# EAGLE board SoM2260 (EAGLE 8.7.1)
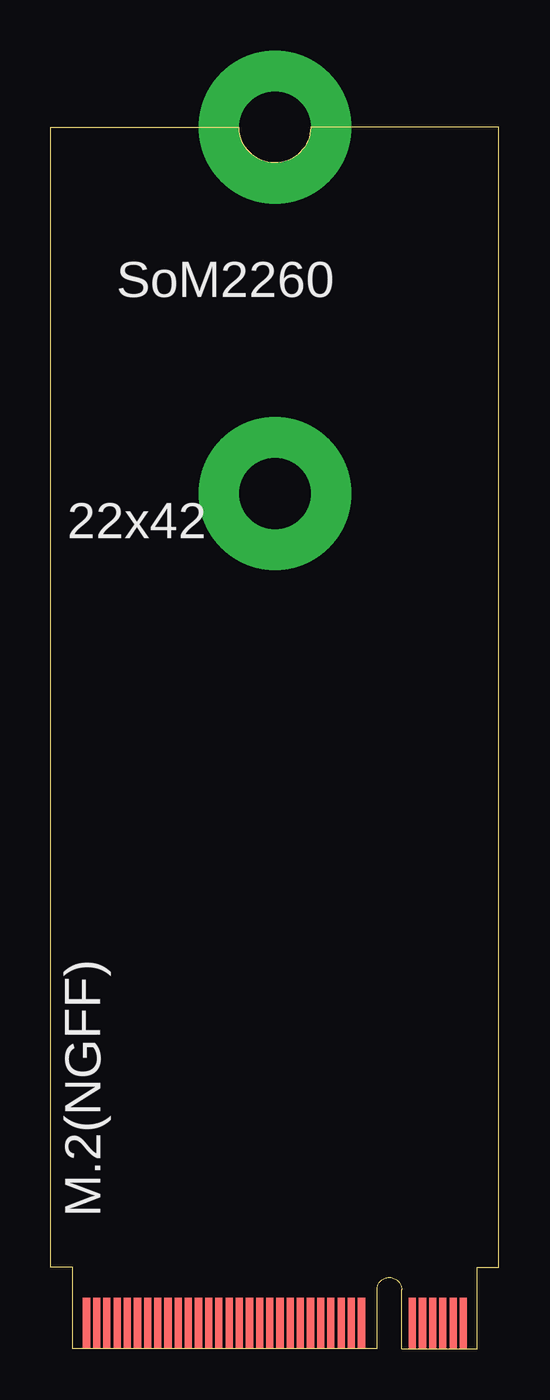
[diagram p0: board, top side]
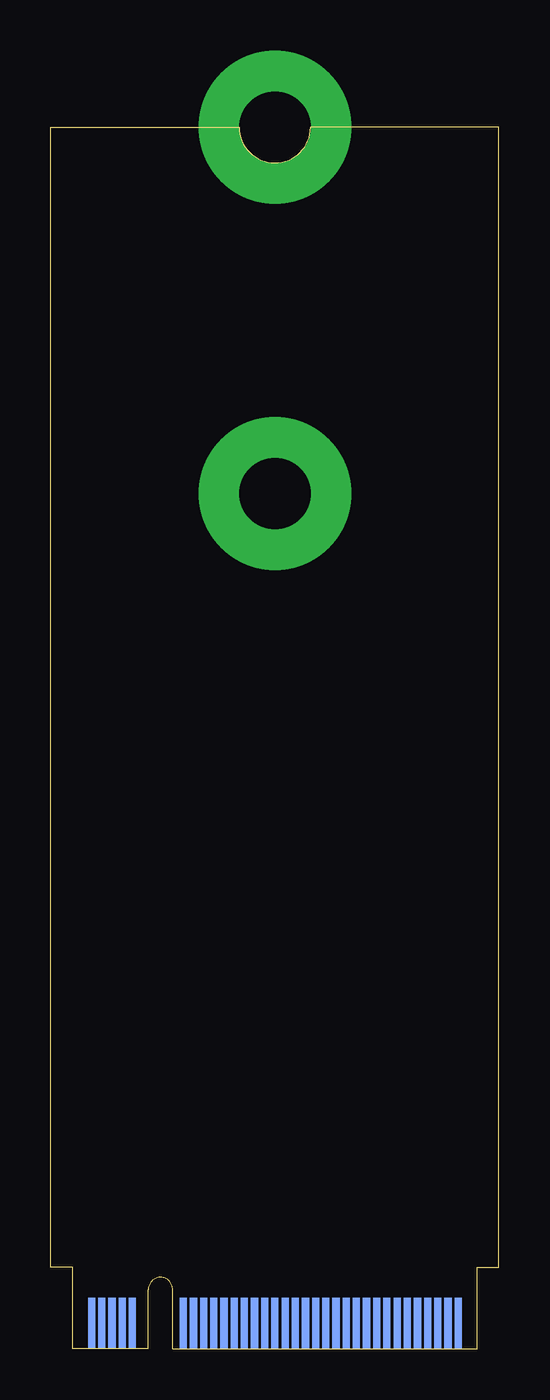
[diagram p1: board, bottom side, seen from below]

Size 22 x 60 mm. Coordinates in mm from the lower left corner, seen from the top.
Outline: 9.25,60 0,60 0,4 1.07,4 1.07,0 16.02,0 16.02,2.9 arc-90 16.6,3.5 arc-90 17.23,2.9 17.23,0 20.93,0 20.93,4 22,4 22,60 12.75,60
Outline: 12.75,60 arc-180 9.25,60
Outline: 12.75,60 arc-180 9.25,60
Copper layers (1*16): Top 0.035mm / dielectric 1.5mm / Bottom 0.035mm
Design rules "default": minimum track width 6mil, minimum drill 0.35mm, track to track 6mil, track to pad 6mil, pad to pad 6mil, via to via 6mil, smd to smd 6mil, copper to edge 40mil, drill to drill 6mil, minimum pad ring 10mil, minimum via ring 8mil, stop-mask expansion 4mil, vias tented up to drill 0mil, thermal gap 10mil

## Footprints (pad centres in the part's own frame; a part is rotated, then mirrored left to right if it is on the bottom)
M.2-MSLOT-TOP = smd 0.35 x 2.5: 1 0,0; 2 -0.5,0; 3 -1,0; 4 -1.5,0; 5 -2,0; 6 -2.5,0; 7 -5,0; 8 -5.5,0; 9 -6,0; 10 -6.5,0; 11 -7,0; 12 -7.5,0; 13 -8,0; 14 -8.5,0; 15 -9,0; 16 -9.5,0; 17 -10,0; 18 -10.5,0; 19 -11,0; 20 -11.5,0; 21 -12,0; 22 -12.5,0; 23 -13,0; 24 -13.5,0; 25 -14,0; 26 -14.5,0; 27 -15,0; 28 -15.5,0; 29 -16,0; 30 -16.5,0; 31 -17,0; 32 -17.5,0; 33 -18,0; 34 -18.5,0
M.2-MSLOT-BOT = smd 0.35 x 2.5: P$1 0,0; P$2 -0.5,0; P$3 -1,0; P$4 -1.5,0; P$5 -2,0; P$6 -4.5,0; P$7 -5,0; P$8 -5.5,0; P$9 -6,0; P$10 -6.5,0; P$11 -7,0; P$12 -7.5,0; P$13 -8,0; P$14 -8.5,0; P$15 -9,0; P$16 -9.5,0; P$17 -10,0; P$18 -10.5,0; P$19 -11,0; P$20 -11.5,0; P$21 -12,0; P$22 -12.5,0; P$23 -13,0; P$24 -13.5,0; P$25 -14,0; P$26 -14.5,0; P$27 -15,0; P$28 -15.5,0; P$29 -16,0; P$30 -16.5,0; P$31 -17,0; P$32 -17.5,0; P$33 -18,0

## Placement (x,y rotation side)
E$1  [M.2-MSLOT-TOP]  20.25,1.25 0 top
E$2  [M.2-MSLOT-BOT]  20,1.25 180 bottom
U$31  SPARK_LOGO  [SPARK_LOGO_TSTOP]  17.22,55.32 0 top

## Library data of the parts
E$1 E$2 U$31 = Spark

## Tracks (layer width: path | path; a pad name or v marks a point on that pad's centre or on a via)
S$2  (via drill 3.5 pad 7.5)
  other vias: 11,60 11,42

## Text on the board
tNames: SoM2260 | 22x42 | M.2(NGFF)